# Altium PCB eq.PcbDoc (part 1 of 2)
Units mil, origin at the board's own origin, x right, y up, seen from the top; angles counter-clockwise.
Board outline 5200 x 16200 mil, 2 copper layers (Top Layer, Bottom Layer); 220 components, 157 nets, 622 pads, 115 vias.
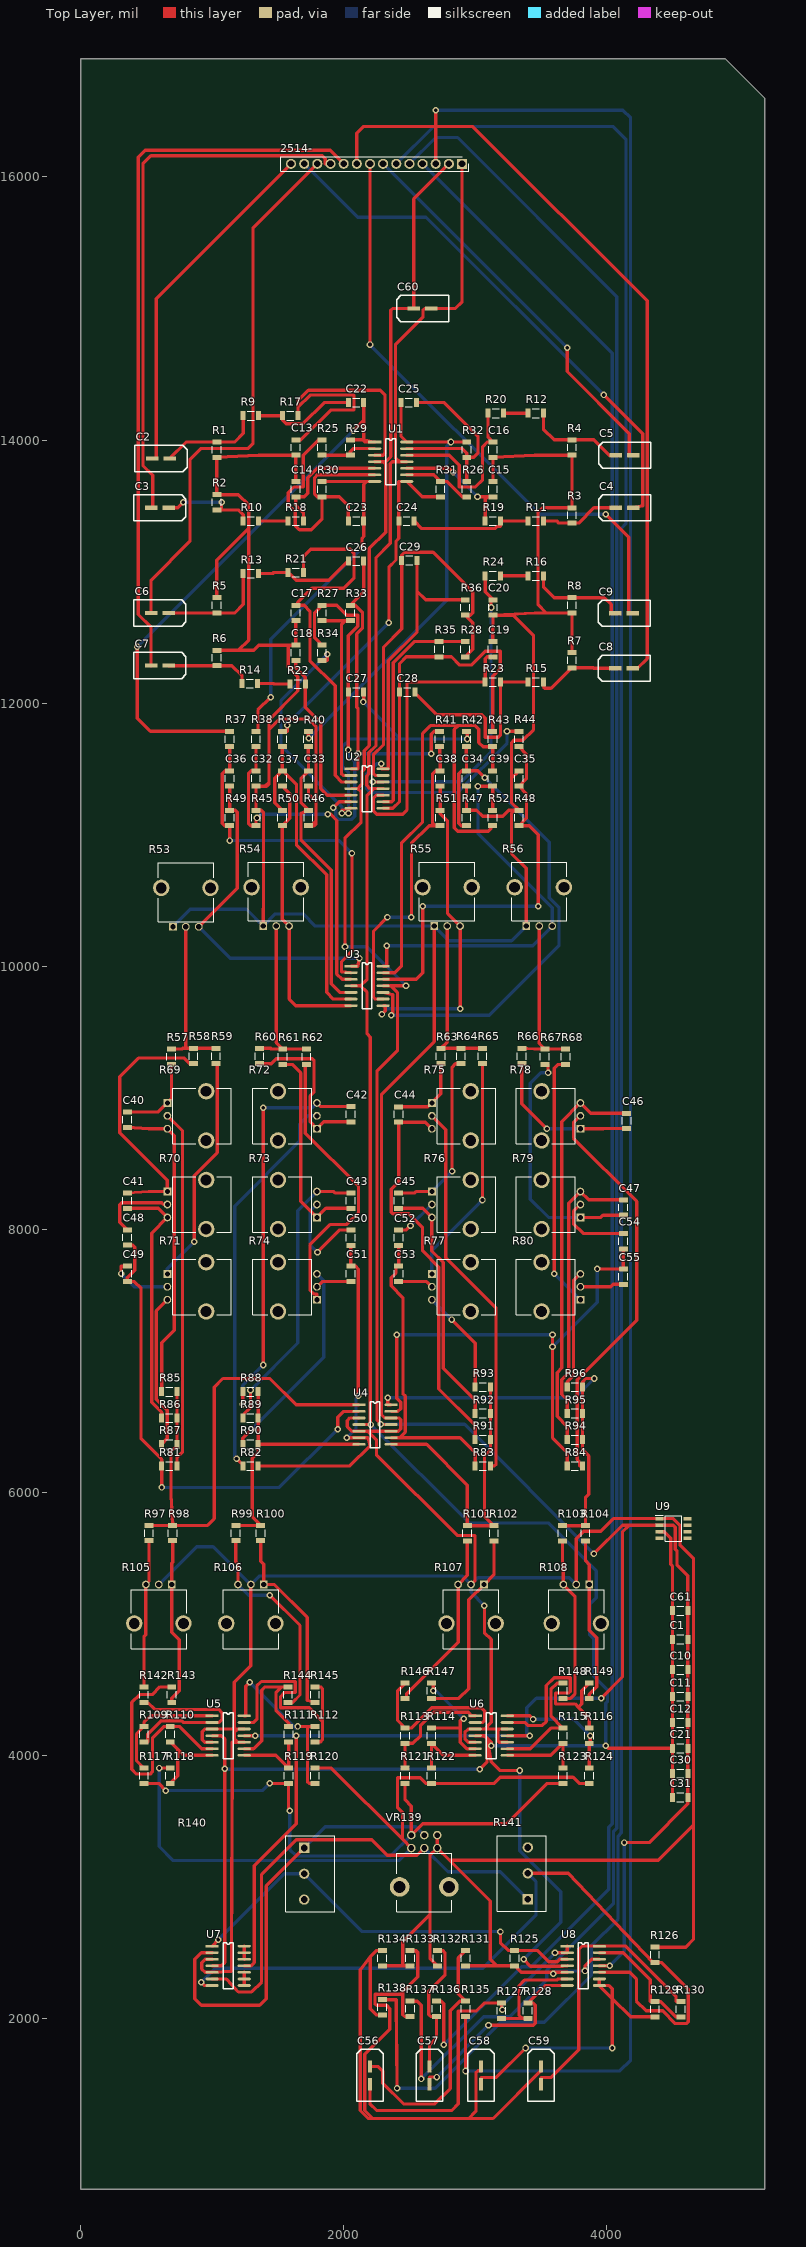
[diagram p0: Top Layer view]
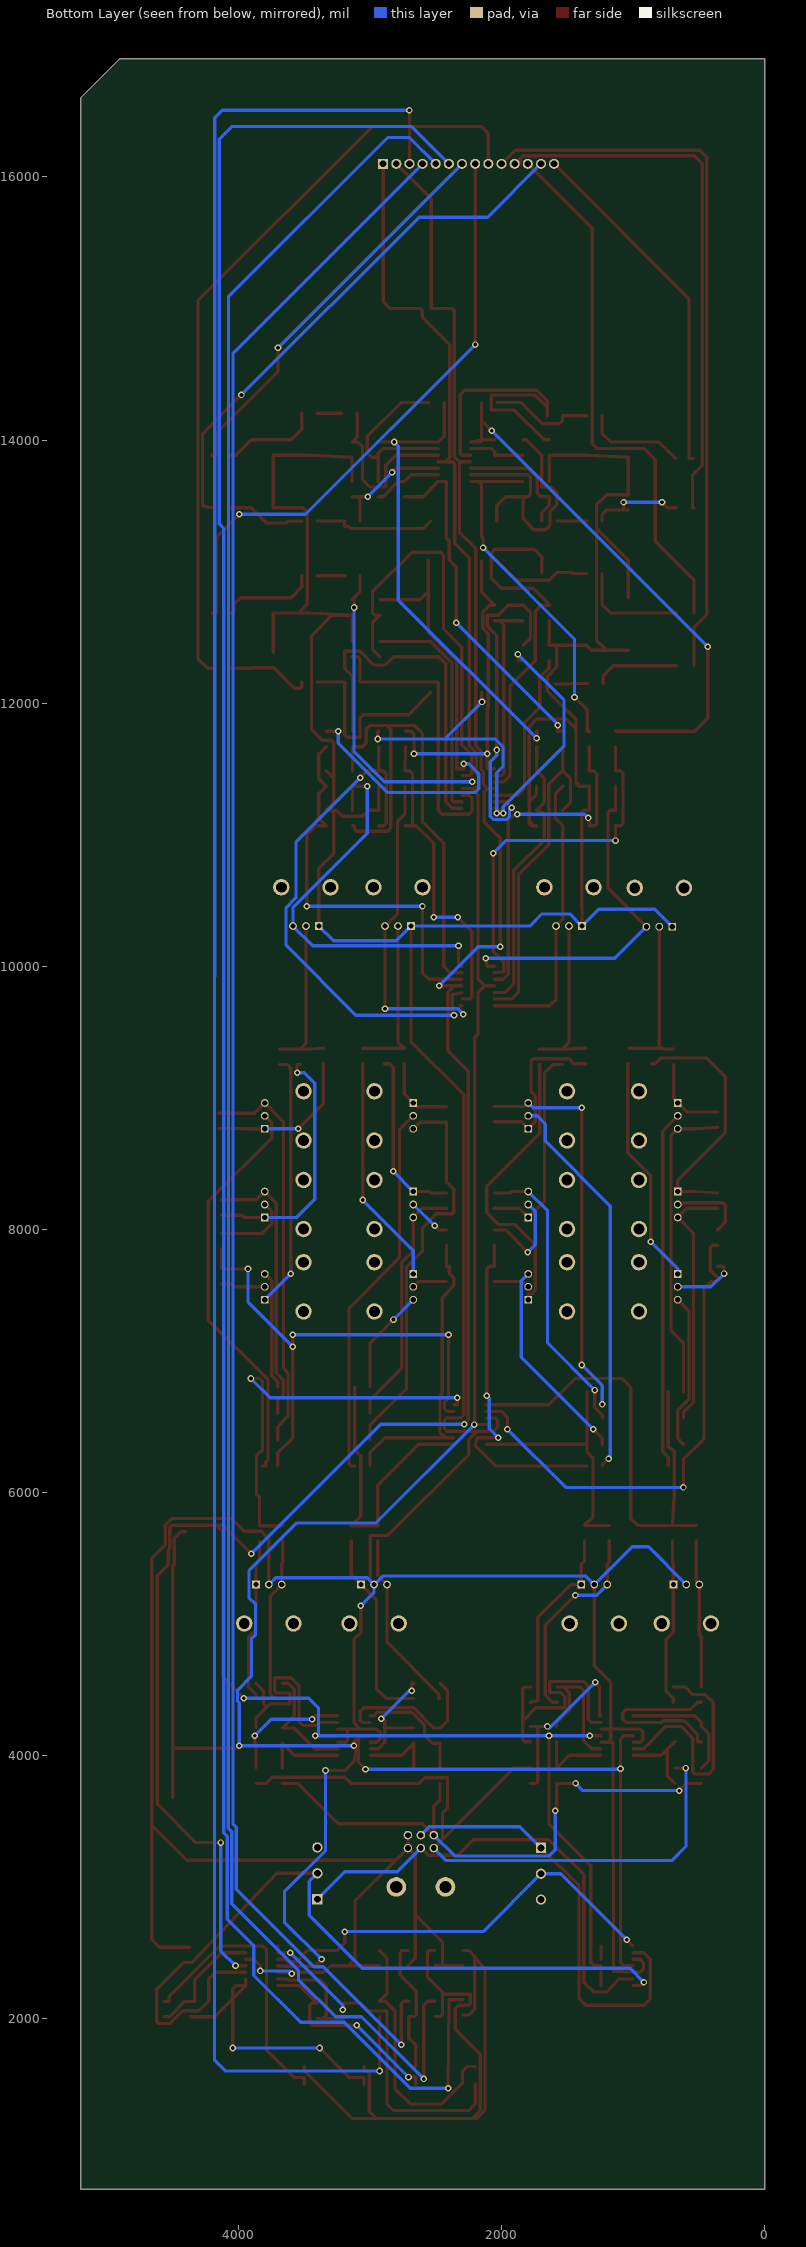
[diagram p1: Bottom Layer view, seen from below]

## Layer stack, top to bottom
Top Solder: solder mask 0.4, Solder Resist, Dk 3.5
Top Layer: signal copper 1.4
Dielectric 1: dielectric 12.6, FR-4, Dk 4.8
Bottom Layer: signal copper 1.4
Bottom Solder: solder mask 0.4, Solder Resist, Dk 3.5

## Board outline
0,16900 0,700 5200,700 5200,16600 4900,16900

## Design rules (kind name [scope] priority, off if disabled: settings)
Clearance [All] p1: gap=10 ignorepadtopadclearanceinfootprint=TRUE except(0: Arc-Hole Track-Hole SMDPad-Hole THPad-Hole Via-Hole Fill-Hole Poly-Hole Region-Hole Text-Hole)
PolygonConnect [All] p1: connectstyle=Relief reliefconductorwidth=10 reliefentries=4 polygonreliefangle="90 Angle" airgapwidth=10
RoutingVias [All] p1: holewidth=28 width=50 viastyle="Through Hole" minholewidth=28 minwidth=50 maxholewidth=28 maxwidth=50
SolderMaskExpansion [All] p1: expansion=4 istentingtop=FALSE
Width [All] p1: maxlimit=50 minlimit=15 preferedwidth=25 minimp=50.000000 maximp=50.000000 favimp=50.000000
30 further rules are at their usual default settings.

## Classes and differential pairs
component class U_Sheet4: 2514- C1 C10 C11 C12 C21 C30 C31 C60 C61 P-25 U9 X1
component class U_schema: C2 C3 C4 C5 C6 C7 C8 C9 C13 C14 C15 C16 C17 C18 C19 C20 C22 C23 C24 C25 C26 C27 C28 C29 C32 C33 C34 C35 C36 C37 C38 C39 P-1 P-2 P-3 P-4 P-5 P-6 P-7 P-9 P-10 P-G P-I P-x R1 R2 R3 R4 R5 R6 R7 R8 R9 R10 R11 R12 R13 R14 R15 R16 R17 R18 R19 R20 R21 R22 R23 R24 R25 R26 R27 R28 R29 R30 R31 R32 R33 R34 R35 R36 R37 R38 R39 R40 R41 R42 R43 R44 R45 R46 R47 R48 R49 R50 R51 R52 R53 R54 R55 R56 U1 U2 U3
component class U_schema3: C56 C57 C58 C59 P-20 P-21 P-22 P-23 P-24 P-? R125 R126 R127 R128 R129 R130 R131 R132 R133 R134 R135 R136 R137 R138 R140 R141 U7 U8 VR139
component class U_schema2: P-17 P-18 P-A P-B P-C P-D P-E P-F R97 R98 R99 R100 R101 R102 R103 R104 R105 R106 R107 R108 R109 R110 R111 R112 R113 R114 R115 R116 R117 R118 R119 R120 R121 R122 R123 R124 R142 R143 R144 R145 R146 R147 R148 R149 U5 U6
component class U_schema1: C40 C41 C42 C43 C44 C45 C46 C47 C48 C49 C50 C51 C52 C53 C54 C55 P-13 P-14 P-15 P-16 R57 R58 R59 R60 R61 R62 R63 R64 R65 R66 R67 R68 R69 R70 R71 R72 R73 R74 R75 R76 R77 R78 R79 R80 R81 R82 R83 R84 R85 R86 R87 R88 R89 R90 R91 R92 R93 R94 R95 R96 U4

## Components (designator, comment, footprint, x,y, rotation, side; value= is the part's Value field where it differs from the comment)
2514- "SSW-114-01-G-S" SHDR14W79P0X254_1X14_3607X241X851P 2900,16100 r180 top
C1 "Cap" SMD_CAPACITOR 4558.27,4881.89 r180 top value=100nF
C2 "Cap Pol1" SMD_POLAR_CAPACITOR 611.27,13860 r0 top value=10µF
C3 "Cap Pol1" SMD_POLAR_CAPACITOR 603,13485 r0 top value=10µF
C4 "Cap Pol1" SMD_POLAR_CAPACITOR 4136,13485 r180 top value=10µF
C5 "Cap Pol1" SMD_POLAR_CAPACITOR 4136,13885 r180 top value=10µF
C6 "Cap Pol1" SMD_POLAR_CAPACITOR 603,12685 r0 top value=10µF
C7 "Cap Pol1" SMD_POLAR_CAPACITOR 603,12285 r0 top value=10µF
C8 "Cap Pol1" SMD_POLAR_CAPACITOR 4132.01,12264.34 r180 top value=10µF
C9 "Cap Pol1" SMD_POLAR_CAPACITOR 4131.99,12682.95 r180 top value=10µF
C10 "Cap" SMD_CAPACITOR 4558.27,4651.27 r180 top value=100nF
C11 "Cap" SMD_CAPACITOR 4558.27,4447.37 r180 top value=100nF
C12 "Cap" SMD_CAPACITOR 4558.27,4248.65 r180 top value=100nF
C13 "Cap" SMD_CAPACITOR 1636,13943.27 r90 top value=1.5nF
C14 "Cap" SMD_CAPACITOR 1636,13626.73 r270 top value=1.5nF
C15 "Cap" SMD_CAPACITOR 3136,13626.73 r270 top value=1.5nF
C16 "Cap" SMD_CAPACITOR 3136,13926.73 r90 top value=1.5nF
C17 "Cap" SMD_CAPACITOR 1636,12685 r90 top value=1.5nF
C18 "Cap" SMD_CAPACITOR 1636,12381.91 r270 top value=1.5nF
C19 "Cap" SMD_CAPACITOR 3134.43,12409.82 r270 top value=1.5nF
C20 "Cap" SMD_CAPACITOR 3136,12726.73 r90 top value=1.5nF
C21 "Cap" SMD_CAPACITOR 4558.27,4053.2 r180 top value=100nF
C22 "Cap" SMD_CAPACITOR 2094.27,14285 r0 top value=100nF
C23 "Cap" SMD_CAPACITOR 2094.27,13385 r0 top value=100nF
C24 "Cap" SMD_CAPACITOR 2477.73,13385 r180 top value=100nF
C25 "Cap" SMD_CAPACITOR 2494.27,14285 r180 top value=100nF
C26 "Cap" SMD_CAPACITOR 2094.27,13080.62 r0 top value=100nF
C27 "Cap" SMD_CAPACITOR 2094.27,12085 r0 top value=100nF
C28 "Cap" SMD_CAPACITOR 2482.73,12085 r180 top value=100nF
C29 "Cap" SMD_CAPACITOR 2499.27,13085 r0 top value=100nF
C30 "Cap" SMD_CAPACITOR 4558.27,3861.72 r180 top value=100nF
C31 "Cap" SMD_CAPACITOR 4558.27,3680.75 r180 top value=100nF
C32 "Cap" SMD_CAPACITOR 1333.31,11426.73 r90 top value=22pF
C33 "Cap" SMD_CAPACITOR 1733.31,11426.73 r90 top value=22pF
C34 "Cap" SMD_CAPACITOR 2933.31,11426.73 r90 top value=22pF
C35 "Cap" SMD_CAPACITOR 3333.31,11426.73 r270 top value=22pF
C36 "Cap" SMD_CAPACITOR 1133.31,11426.73 r270 top value=22pF
C37 "Cap" SMD_CAPACITOR 1533.31,11426.73 r270 top value=22pF
C38 "Cap" SMD_CAPACITOR 2733.31,11426.73 r270 top value=22pF
C39 "Cap" SMD_CAPACITOR 3132.7,11426.73 r270 top value=22pF
C40 "Cap" SMD_CAPACITOR 355,8833.27 r270 top value=47nF
C41 "Cap" SMD_CAPACITOR 355,8216.73 r270 top value=4nF7
C42 "Cap" SMD_CAPACITOR 2055,8875 r90 top value=47nF
C43 "Cap" SMD_CAPACITOR 2055,8216.73 r90 top value=4nF7
C44 "Cap" SMD_CAPACITOR 2418.53,8872.47 r270 top value=47nF
C45 "Cap" SMD_CAPACITOR 2418.53,8216.73 r270 top value=4nF7
C46 "Cap" SMD_CAPACITOR 4151.73,8823.27 r90 top value=47nF
C47 "Cap" SMD_CAPACITOR 4126.73,8165 r90 top value=4nF7
C48 "Cap" SMD_CAPACITOR 355,7937.05 r270 top value=4nF7
C49 "Cap" SMD_CAPACITOR 355,7660.43 r270 top value=4nF7
C50 "Cap" SMD_CAPACITOR 2055,7936.16 r270 top value=4nF7
C51 "Cap" SMD_CAPACITOR 2055,7660.43 r90 top value=4nF7
C52 "Cap" SMD_CAPACITOR 2418.53,7936.16 r270 top value=4nF7
C53 "Cap" SMD_CAPACITOR 2418.53,7660.43 r90 top value=4nF7
C54 "Cap" SMD_CAPACITOR 4126.73,7909.58 r270 top value=4nF7
C55 "Cap" SMD_CAPACITOR 4126.73,7639.8 r90 top value=4nF7
C56 "Cap Pol1" SMD_POLAR_CAPACITOR 2200,1567 r90 top value=10µF
C57 "Cap Pol1" SMD_POLAR_CAPACITOR 2652.87,1567 r90 top value=10µF
C58 "Cap Pol1" SMD_POLAR_CAPACITOR 3044.82,1567 r90 top value=10µF
C59 "Cap Pol1" SMD_POLAR_CAPACITOR 3500,1567 r90 top value=10µF
C60 "Cap Pol1" SMD_POLAR_CAPACITOR 2600,15000 r180 top value=100pF
C61 "Cap" SMD_CAPACITOR 4558.27,5100 r180 top value=100nF
R1 "Res2" SMD_RESISTOR 1036,13926.73 r90 top value=1K5
R2 "Res2" SMD_RESISTOR 1036,13526.73 r270 top value=1K5
R3 "Res2" SMD_RESISTOR 3736,13426.73 r270 top value=1K5
R4 "Res2" SMD_RESISTOR 3736,13943.27 r90 top value=1K5
R5 "Res2" SMD_RESISTOR 1036,12743.27 r270 top value=1K5
R6 "Res2" SMD_RESISTOR 1036,12343.27 r270 top value=1K5
R7 "Res2" SMD_RESISTOR 3736,12326.73 r270 top value=1K5
R8 "Res2" SMD_RESISTOR 3736,12743.27 r90 top value=1K5
R9 "Res2" SMD_RESISTOR 1294.27,14185 r0 top value=430R
R10 "Res2" SMD_RESISTOR 1294.27,13385 r0 top value=430R
R11 "Res2" SMD_RESISTOR 3460.46,13385 r180 top value=430R
R12 "Res2" SMD_RESISTOR 3460.46,14203.88 r180 top value=430R
R13 "Res2" SMD_RESISTOR 1294.27,12985 r0 top value=430R
R14 "Res2" SMD_RESISTOR 1285.7,12149.22 r0 top value=430R
R15 "Res2" SMD_RESISTOR 3460.46,12159.7 r180 top value=430R
R16 "Res2" SMD_RESISTOR 3460.46,12967.84 r180 top value=430R
R17 "Res2" SMD_RESISTOR 1594.27,14185 r0 top value=430R
R18 "Res2" SMD_RESISTOR 1636,13385 r0 top value=430R
R19 "Res2" SMD_RESISTOR 3134.43,13385 r180 top value=430R
R20 "Res2" SMD_RESISTOR 3155.56,14203.88 r180 top value=430R
R21 "Res2" SMD_RESISTOR 1636,12993.63 r0 top value=430R
R22 "Res2" SMD_RESISTOR 1649.91,12145.73 r0 top value=430R
R23 "Res2" SMD_RESISTOR 3134.43,12159.7 r180 top value=430R
R24 "Res2" SMD_RESISTOR 3134.43,12967.84 r180 top value=430R
R25 "Res2" SMD_RESISTOR 1836,13943.27 r270 top value=680R
R26 "Res2" SMD_RESISTOR 2936,13626.73 r270 top value=680R
R27 "Res2" SMD_RESISTOR 1836,12685 r270 top value=680R
R28 "Res2" SMD_RESISTOR 2924.36,12409.82 r90 top value=680R
R29 "Res2" SMD_RESISTOR 2050.96,13943.27 r90 top value=150R
R30 "Res2" SMD_RESISTOR 1836,13626.73 r90 top value=150R
R31 "Res2" SMD_RESISTOR 2736,13626.73 r270 top value=150R
R32 "Res2" SMD_RESISTOR 2936,13926.73 r90 top value=150R
R33 "Res2" SMD_RESISTOR 2050.96,12685 r90 top value=150R
R34 "Res2" SMD_RESISTOR 1836,12381.91 r270 top value=150R
R35 "Res2" SMD_RESISTOR 2725.96,12409.82 r270 top value=150R
R36 "Res2" SMD_RESISTOR 2924.36,12726.73 r90 top value=150R
R37 "Res2" SMD_RESISTOR 1133.31,11726.73 r270 top value=1K
R38 "Res2" SMD_RESISTOR 1333.31,11726.73 r270 top value=1K
R39 "Res2" SMD_RESISTOR 1533.31,11726.73 r270 top value=1K
R40 "Res2" SMD_RESISTOR 1731.37,11726.73 r270 top value=1K
R41 "Res2" SMD_RESISTOR 2729.88,11726.73 r270 top value=1K
R42 "Res2" SMD_RESISTOR 2932.51,11726.73 r270 top value=1K
R43 "Res2" SMD_RESISTOR 3132.7,11726.73 r270 top value=1K
R44 "Res2" SMD_RESISTOR 3333.31,11726.73 r270 top value=1K
R45 "Res2" SMD_RESISTOR 1333.31,11126.73 r270 top value=1K
R46 "Res2" SMD_RESISTOR 1733.31,11126.73 r90 top value=1K
R47 "Res2" SMD_RESISTOR 2933.31,11126.73 r270 top value=1K
R48 "Res2" SMD_RESISTOR 3333.31,11126.73 r270 top value=1K
R49 "Res2" SMD_RESISTOR 1133.31,11126.73 r90 top value=1K
R50 "Res2" SMD_RESISTOR 1533.31,11126.73 r270 top value=1K
R51 "Res2" SMD_RESISTOR 2733.31,11126.73 r90 top value=1K
R52 "Res2" SMD_RESISTOR 3133.31,11126.73 r90 top value=1K
R53 "*" RK09L1140A65 701.57,10300 r0 top value="10K Log"
R54 "*" RK09L1140A65 1388.58,10304.72 r0 top value="10K Log"
R55 "*" RK09L1140A65 2688.58,10304.72 r0 top value="10K Log"
R56 "*" RK09L1140A65 3388.58,10304.72 r0 top value="10K Log"
R57 "Res2" SMD_RESISTOR 690.38,9311.15 r270 top value=11K
R58 "Res2" SMD_RESISTOR 858.44,9316.73 r270 top value=3K6
R59 "Res2" SMD_RESISTOR 1029.88,9316.73 r270 top value=2K4
R60 "Res2" SMD_RESISTOR 1360.08,9316.73 r270 top value=11K
R61 "Res2" SMD_RESISTOR 1536.8,9311.15 r270 top value=3K6
R62 "Res2" SMD_RESISTOR 1718.18,9311.15 r270 top value=2K4
R63 "Res2" SMD_RESISTOR 2739.07,9316.73 r270 top value=11K
R64 "Res2" SMD_RESISTOR 2892.56,9316.73 r270 top value=3K6
R65 "Res2" SMD_RESISTOR 3055,9316.73 r270 top value=2K4
R66 "Res2" SMD_RESISTOR 3355,9316.73 r270 top value=11K
R67 "Res2" SMD_RESISTOR 3529.69,9311.15 r270 top value=3K6
R68 "Res2" SMD_RESISTOR 3687.81,9311.15 r270 top value=2K4
R69 "*" RK09L1140A65 659.72,8960.43 r270 top value=100K
R70 "*" RK09L1140A65 659.72,8286.42 r270 top value=100K
R71 "*" RK09L1140A65 659.72,7660.43 r270 top value=50K
R72 "*" RK09L1140A65 1796.45,8763.58 r90 top value=100K
R73 "*" RK09L1140A65 1796.45,8089.57 r90 top value=100K
R74 "*" RK09L1140A65 1796.45,7463.58 r90 top value=50K
R75 "*" RK09L1140A65 2670.73,8960.43 r270 top value=100K
R76 "*" RK09L1140A65 2670.73,8286.42 r270 top value=100K
R77 "*" RK09L1140A65 2670.73,7660.43 r270 top value=50K
R78 "*" RK09L1140A65 3799.87,8763.58 r90 top value=100K
R79 "*" RK09L1140A65 3799.87,8089.57 r90 top value=100K
R80 "*" RK09L1140A65 3799.87,7463.58 r90 top value=50K
R81 "Res2" SMD_RESISTOR 675,6200 r0 top value=11K
R82 "Res2" SMD_RESISTOR 1291.45,6200 r180 top value=11K
R83 "Res2" SMD_RESISTOR 3058.27,6200 r0 top value=11K
R84 "Res2" SMD_RESISTOR 3758.27,6200 r0 top value=11K
R85 "Res2" SMD_RESISTOR 675,6765 r0 top value=11K
R86 "Res2" SMD_RESISTOR 675,6565 r0 top value=3K6
R87 "Res2" SMD_RESISTOR 675,6365 r0 top value=2K4
R88 "Res2" SMD_RESISTOR 1291.45,6765 r0 top value=11K
R89 "Res2" SMD_RESISTOR 1291.45,6565 r0 top value=3K6
R90 "Res2" SMD_RESISTOR 1291.45,6365 r0 top value=2K4
R91 "Res2" SMD_RESISTOR 3058.27,6400 r0 top value=11K
R92 "Res2" SMD_RESISTOR 3058.27,6600 r0 top value=3K6
R93 "Res2" SMD_RESISTOR 3058.27,6800 r0 top value=2K4
R94 "Res2" SMD_RESISTOR 3758.27,6400 r0 top value=11K
R95 "Res2" SMD_RESISTOR 3758.27,6600 r0 top value=3K6
R96 "Res2" SMD_RESISTOR 3758.27,6800 r0 top value=2K4
R97 "Res2" SMD_RESISTOR 520,5690 r270 top value=10K
R98 "Res2" SMD_RESISTOR 700.04,5690 r270 top value=10K
R99 "Res2" SMD_RESISTOR 1179.81,5690 r270 top value=10K
R100 "Res2" SMD_RESISTOR 1369.37,5690 r270 top value=10K
R101 "Res2" SMD_RESISTOR 2940.55,5688.3 r270 top value=10K
R102 "Res2" SMD_RESISTOR 3142.74,5688.3 r270 top value=10K
R103 "Res2" SMD_RESISTOR 3663.62,5688.3 r270 top value=10K
R104 "Res2" SMD_RESISTOR 3839.37,5688.3 r270 top value=10K
R105 "*" RK09L1140A65 693.15,5298.54 r180 top value=10K
R106 "*" RK09L1140A65 1393.15,5298.54 r180 top value=10K
R107 "*" RK09L1140A65 3067.17,5298.54 r180 top value=10K
R108 "*" RK09L1140A65 3867.17,5298.54 r180 top value=10K
R109 "Res2" SMD_RESISTOR 481.73,4161.54 r90 top value=51K
R110 "Res2" SMD_RESISTOR 681.73,4161.54 r270 top value=51K
R111 "Res2" SMD_RESISTOR 1581.73,4161.54 r270 top value=51K
R112 "Res2" SMD_RESISTOR 1781.73,4161.54 r90 top value=51K
R113 "Res2" SMD_RESISTOR 2467.17,4149.5 r270 top value=51K
R114 "Res2" SMD_RESISTOR 2667.17,4149.5 r270 top value=51K
R115 "Res2" SMD_RESISTOR 3667.17,4149.5 r270 top value=51K
R116 "Res2" SMD_RESISTOR 3867.17,4149.5 r270 top value=51K
R117 "Res2" SMD_RESISTOR 481.73,3845 r270 top value=1K
R118 "Res2" SMD_RESISTOR 681.73,3845 r90 top value=1K
R119 "Res2" SMD_RESISTOR 1581.73,3845 r270 top value=1K
R120 "Res2" SMD_RESISTOR 1781.73,3845 r90 top value=1K
R121 "Res2" SMD_RESISTOR 2467.17,3845 r270 top value=1K
R122 "Res2" SMD_RESISTOR 2667.17,3845 r270 top value=1K
R123 "Res2" SMD_RESISTOR 3667.17,3845 r270 top value=1K
R124 "Res2" SMD_RESISTOR 3867.17,3845 r270 top value=1K
R125 "Res2" SMD_RESISTOR 3300,2458.27 r90 top value=470K
R126 "Res2" SMD_RESISTOR 4367.73,2483.06 r270 top value=470K
R127 "Res2" SMD_RESISTOR 3200,2058.27 r90 top value=10K
R128 "Res2" SMD_RESISTOR 3400,2058.27 r90 top value=10K
R129 "Res2" SMD_RESISTOR 4367.74,2070.69 r270 top value=10K
R130 "Res2" SMD_RESISTOR 4563.26,2070.69 r90 top value=10K
R131 "Res2" SMD_RESISTOR 2927.93,2458.27 r90 top value=10K
R132 "Res2" SMD_RESISTOR 2712.99,2458.27 r90 top value=10K
R133 "Res2" SMD_RESISTOR 2505.65,2458.27 r90 top value=10K
R134 "Res2" SMD_RESISTOR 2294.28,2458.27 r90 top value=10K
R135 "Res2" SMD_RESISTOR 2927.93,2072.76 r270 top value=10K
R136 "Res2" SMD_RESISTOR 2705.13,2072.76 r90 top value=10K
R137 "Res2" SMD_RESISTOR 2505.65,2072.76 r90 top value=10K
R138 "Res2" SMD_RESISTOR 2294.28,2083.88 r90 top value=10K
R140 "PDB181-K215K-104B" PDB181K220K104B 1700,3296.85 r180 top
R141 "PDB181-K215K-104B" PDB181K220K104B 3400,2906.3 r0 top
R142 "Res2" SMD_RESISTOR 481.73,4461.54 r270 top value=10K
R143 "Res2" SMD_RESISTOR 693.15,4461.54 r90 top value=10K
R144 "Res2" SMD_RESISTOR 1576.49,4461.54 r90 top value=10K
R145 "Res2" SMD_RESISTOR 1781.73,4461.54 r90 top value=10K
R146 "Res2" SMD_RESISTOR 2467.17,4490.67 r90 top value=10K
R147 "Res2" SMD_RESISTOR 2667.17,4490.67 r90 top value=10K
R148 "Res2" SMD_RESISTOR 3667.17,4490.67 r90 top value=10K
R149 "Res2" SMD_RESISTOR 3867.17,4490.67 r90 top value=10K
U1 "OPA1664AIDR" OPA1664AIDR 2236,13985 r0 top
U2 "OPA1664AIDR" OPA1664AIDR 2056,11500 r0 top
U3 "OPA1664AIDR" OPA1664AIDR 2056,10000 r0 top
U4 "OPA1664AIDR" OPA1664AIDR 2116.73,6665 r0 top
U5 "OPA1664AIDR" OPA1664AIDR 1000,4300 r0 top
U6 "OPA1664AIDR" OPA1664AIDR 3000,4300 r0 top
U7 "OPA1664AIDR" OPA1664AIDR 1000,2550 r0 top
U8 "OPA1664AIDR" OPA1664AIDR 3700,2550 r0 top
U9 "TLE2426CDR" SOIC127P600X175-8N 4506.73,5725 r0 top
VR139 "RK09L1240A12" RK09L124A12 2712.99,3393.7 r90 top

## Footprints (in the part's own frame and the unit in brackets; to place one, negate y for a bottom-side part, rotate by r counter-clockwise, add the part's x,y. Pads: shape width x height; smd on the part's side, far side on the other; paste and mask are expansions set on the pad)
OPA1664AIDR [mil]
  rect 100x20 smd: 1(0,0)
  oval 100x20 smd: 2(0,-50) 3(0,-100) 4(0,-150) 5(0,-200) 6(0,-250) 7(0,-300) 8(244,-300) 9(244,-250) 10(244,-200) 11(244,-150) 12(244,-100) 13(244,-50) 14(244,0)
  silkscreen extent 85,-325 159,25
PDB181K220K104B [mm]
  rect 1.98x1.98 hole 1.32: 1(0,0)
  round 1.98 hole 1.32: 2(0,5) 3(0,10)
  silkscreen extent -5.9,-2.3 3.6,12.3
RK09L124A12 [mm]
  round 1.65 hole 1.1: A1(0,0.04) A2(0,2.54) A3(0,5.04) B1(-2.5,0.04) B2(-2.5,2.54) B3(-2.5,5.04)
  round 3.795 hole 2.33: MH1(-10,-2.21) MH2(-10,7.29)
  silkscreen extent -14.85,-2.81 -3.5,7.89, body extent -14.85,-3.27 0.45,8.35, height 30.1
RK09L1140A65 [mm]
  rect 1.5x1.5 hole 1: 1(0,0)
  round 1.5 hole 1: 2(2.5,0) 3(5,0)
  round 3.164 hole 2.11: MH1(-2.25,7.5) MH2(7.25,7.5)
  silkscreen extent -2.85,1 7.85,12.35, body extent -3.2,-0.4 8.2,12.35, height 35.1
SHDR14W79P0X254_1X14_3607X241X851P [mm]
  rect 1.95x1.95 hole 1.3: 1(0,0)
  round 1.95 hole 1.3: 2(2.54,0) 3(5.08,0) 4(7.62,0) 5(10.16,0) 6(12.7,0) 7(15.24,0) 8(17.78,0) 9(20.32,0) 10(22.86,0) 11(25.4,0) 12(27.94,0) 13(30.48,0) 14(33.02,0)
  silkscreen extent -1.27,-1.33 35.05,1.45
SMD_CAPACITOR [mm]
  rect 0.97x1.73 smd: 1(-1.48,0) 2(1.48,0)
  silkscreen extent -0.67,-0.85 0.67,0.85
SMD_POLAR_CAPACITOR [mil]
  rect 94x32 smd: 1(-67,0) 2(67,0)
  silkscreen extent -198,-100 198,100
SMD_RESISTOR [mm]
  rect 0.97x1.73 smd: 1(-1.48,0) 2(1.48,0)
  silkscreen extent -0.67,-0.85 0.67,0.85
SOIC127P600X175-8N [mm]
  rect 1.528x0.65 smd: 1(-2.711,1.905) 2(-2.711,0.635) 3(-2.711,-0.635) 4(-2.711,-1.905) 5(2.711,-1.905) 6(2.711,-0.635) 7(2.711,0.635) 8(2.711,1.905)
  silkscreen extent -3.47,-2.45 1.6,2.58, body extent -3,-2.45 3,2.45, height 1.75

## Part data
2514-: "Capacitor", Manufacturer_Name=SAMTEC, Datasheet Link=http://suddendocs.samtec.com/prints/ssw-1xx-xx-xxx-x-xx-xxx-xx-mkt.pdf, Height=8.51mm, Manufacturer_Part_Number=SSW-114-01-G-S
C1 C10 C11 C12 C13 C14 C15 C16 C17 C18 C19 C20 C21 C22 C23 C24 C25 C26 C27 C28 C29 C30 C31 C32 C33 C34 C35 C36 C37 C38 C39 C40 C41 C42 C43 C44 C45 C46 C47 C48 C49 C50 C51 C52 C53 C54 C55 C61: "Capacitor", LatestRevisionDate=17-Jul-2002, LatestRevisionNote="Re-released for DXP Platform.", PackageDescription="Radial Cap, Thru-Hole; 2 Leads; 0.3 in Pin Spacing", PackageReference=RAD-0.3, Published=8-Jun-2000, Publisher="Altium Limited"
C2 C3 C4 C5 C6 C7 C8 C9 C56 C57 C58 C59 C60: "Polarized Capacitor (Radial)", LatestRevisionDate=17-Jul-2002, LatestRevisionNote="Re-released for DXP Platform.", PackageDescription="Polarized Capacitor (Radial); 2 Leads", PackageReference=RB7.6-15, Published=8-Jun-2000, Publisher="Altium Limited"
R1 R2 R3 R4 R5 R6 R7 R8 R9 R10 R11 R12 R13 R14 R15 R16 R17 R18 R19 R20 R21 R22 R23 R24 R25 R26 R27 R28 R29 R30 R31 R32 R33 R34 R35 R36 R37 R38 R39 R40 R41 R42 R43 R44 R45 R46 R47 R48 R49 R50 R51 R52 R57 R58 R59 R60 R61 R62 R63 R64 R65 R66 R67 R68 R81 R82 R83 R84 R85 R86 R87 R88 R89 R90 R91 R92 R93 R94 R95 R96 R97 R98 R99 R100 R101 R102 R103 R104 R109 R110 R111 R112 R113 R114 R115 R116 R117 R118 R119 R120 R121 R122 R123 R124 R125 R126 R127 R128 R129 R130 R131 R132 R133 R134 R135 R136 R137 R138 R142 R143 R144 R145 R146 R147 R148 R149: "Resistor", LatestRevisionDate=17-Jul-2002, LatestRevisionNote="Re-released for DXP Platform.", PackageDescription="Axial Device, Thru-Hole; 2 Leads; 0.4 in Pin Spacing", PackageReference=AXIAL-0.4, Published=8-Jun-2000, Publisher="Altium Limited"
R53 R54 R55 R56: library part RK09L, DeviceSetName=RK09L, GateName_1=G$1, LibraryName=SD_Pots, SymbolName_1=POT_EU-
R69 R70 R71 R72 R73 R74 R75 R76 R77 R78 R79 R80 R105 R106 R107 R108: library part RK09L_1, DeviceSetName=RK09L, GateName_1=G$1, LibraryName=SD_Pots, SymbolName_1=POT_EU-
R140 R141: "Variable Resistor", Manufacturer_Name=Bourns, Height=16.5mm, Manufacturer_Part_Number=PDB181-K215K-104B
U1 U2 U3 U4 U5 U6 U7 U8: library part CMP-0272-00211-3, "Sound Plus Low-Power, Low-Noise and Distortion, Audio Operational Amplifier, 3 to 36 V, -40 to 85 degC, 14-pin SOIC (D14), Green (RoHS & no Sb/Br)", Manufacturer="Texas Instruments", Rating=Catalog, Total Supply Voltage(Max)(+5V is 5, +/-5V is 10)=36, Total Supply Voltage(Min)(+5V is 5, +/-5V is 10)=3, CMRR(Min)(dB)=106, Code_JEDEC=MS-012, ComponentLink1Description="Manufacturer URL", ComponentLink1URL=http://www.ti.com/, ComponentLink2Description=Datasheet, ComponentLink2URL=http://www.ti.com/lit/ds/symlink/opa1664.pdf, ComponentLink3Description="Package Specification", ComponentLink3URL=http://www.ti.com/lit/ml/mpds177g/mpds177g.pdf, DatasheetVersion=SBOS489, Eco-Plan="Green (RoHS & no Sb/Br)", GBW(Typ)(MHz)=22, IIB(Max)(pA)=1200000, Iq per channel(Max)(mA)=1.5, Mounting Technology="Surface Mount", Number of Channels=4, Offset Drift(Typ)(uV/C)=2, PackageDescription="14-Pin Plastic Small Outline, Body 8.65 x 3.9 mm, Pitch 1.27 mm", PackageReference=D0014A, PackageVersion="4040047-5/M, 06/2011", Packing="LARGE T&R", PartNumber=OPA1664AIDR, Slew Rate(Typ)(V/us)=17, Sub Family="Audio Operational Amplifier, High Supply Voltage Amplifier (>=30V), Low Noise Amp (<=10nV/rtHz), Precision Amplifier", Vio (25C)(Max)(mV)=1.5
U9: "Integrated Circuit", Manufacturer_Name="Texas Instruments", Mouser2 Part Number=595-TLE2426CDR, Datasheet Link=http://www.ti.com/lit/gpn/TLE2426, Height=1.75mm, Manufacturer_Part_Number=TLE2426CDR, Mouser2 Price/Stock=https://www.mouser.com/Search/Refine.aspx?Keyword=595-TLE2426CDR
VR139: "Variable Resistor", Manufacturer_Name=ALPS, Mouser2 Part Number=688-RK09L1240A12, Datasheet Link=https://componentsearchengine.com/Datasheets/1/RK09L1240A12.pdf, Height=30mm, Manufacturer_Part_Number=RK09L1240A12, Mouser2 Price/Stock=https://www.mouser.com/Search/Refine.aspx?Keyword=688-RK09L1240A12

## Via types
v1: diameter 50, hole 28, Top Layer to Bottom Layer, 115 vias

## Nets (pads, with @x,y where several pads share a name; then routed paths per layer and width w, separated by ;. In a path a pad name is that pad's centre, name@x,y a point inside that pad or via, vN(x,y) a via of type N, cw(c..) or ccw(c..) an arc to the next point about the centre after c; other vN are vias at no path point)
AGND: C13.1 C14.1 C15.1 C16.1 C17.1 C18.1 C19.1 C20.1 C32.1 C33.1 C34.1 C35.1 R1.1 R2.1 R3.1 R4.1 R5.1 R6.1 R7.1 R8.1 R45.1 R46.1 R47.1 R48.1 R53.1 R54.1 R55.1 R56.1 R105.2 R106.2 R107.2 R108.2 R125.1 R126.1 R131.1 R132.1 R133.1 R134.1 U4.3 U4.5 U4.10 U4.12 U5.3 U5.5 U5.10 U5.12 U6.3 U6.5 U6.10 U6.12 U7.3 U7.5 U8.5 U8.12 U9.1 VR139.A1 VR139.B1 | length 43865
  Top Layer w25: U7.3@1000,2450 946,2450 921,2425 921,2375 946,2350 U7.5@1000,2350 1148,2358 1152,4100 1193.32,4100 ; U5.5@1000,4100 944,4100 925,4119 925,4181 944,4200 U5.3@1000,4200 1181.5,4200 ; R6.1@1036,12401.54 1200,12401.54 ; R5.1@1036,12801.54 1036,13086 1278,13328 ; U5.10@1244,4100 1193.32,4100 ; U5.12@1244,4200 1193.32,4200 ; R106.2@1294.72,5298.54 1294.72,4680.72 1169,4555 1169,4212.5 1181.5,4200 ; R54.1@1388.58,10304.72 1388.58,10437.58 1390,10439 1390,11170 1375,11185 R45.1@1333.31,11185 C32.1@1333.31,11368.46 1401.46,11368.46 ; C17.1@1636,12626.73 C18.1@1636,12440.18 1594.18,12440.18 ; C14.1@1636,13685 C13.1@1636,13885 1352.54,13885 R1.1@1036,13868.46 R2.1@1036,13585 1200,13585 1278,13507 1278,13328 ; R46.1@1733.31,11068.46 R46.1@1753.35,11068.46 ; C33.1@1733.31,11368.46 1733.31,11305.69 1790,11249 ; U4.3@2116.73,6565 2048,6565 2028,6545 2028,6500 2063,6465 U4.5@2116.73,6465 2162.21,6465 2184,6465 ; R134.1@2294.28,2400 2461.5,2400 ; R133.1@2505.65,2400 2461.5,2400 ; R55.1@2688.58,10304.72 2688.58,9426.58 2288,9026 2288,6587.5 2310.5,6565 U4.12@2360.73,6565 2420,6565 2433.23,6551.77 2433.23,6483 2415.23,6465 U4.10@2360.73,6465 2184,6465 ; VR139.A1@2711.42,3393.7 VR139.B1@2711.42,3295.28 ; R132.1@2712.99,2400 2656,2456.99 2656,2789 ; R131.1@2927.93,2400 3164,2400 ; C34.1@2933.31,11368.46 R47.1@2933.31,11185 3010,11185 3056,11139 3210,11139 3256,11185 3298.5,11185 ; R107.2@2968.74,5298.54 2998,5327.8 2998,5672 2863,5672 2249,6286 2249,6400 2184,6465 ; U6.5@3000,4100 2947,4100 2922,4125 2922,4175 2947,4200 U6.3@3000,4200 3072,4200 ; v1(3070,5137) 3070,4933 3122,4881 3122,4250 3072,4200 ; C19.1@3134.43,12468.09 3134.43,12567 3136,12568.57 C20.1@3136,12668.46 ; C15.1@3136,13685 C16.1@3136,13868.46 3452.54,13885 R4.1@3736,13885 R3.1@3736,13485 3512,13485 3477,13450 3477,12750 3542,12685 ; U6.10@3244,4100 3183.5,4100 3171,4112.5 3171,4187.5 3183.5,4200 ; U6.12@3244,4200 3183.5,4200 ; C35.1@3333.31,11485 3276,11427.69 ; R56.1@3388.58,10304.72 3388.58,10743.42 3276,10856 3276,11162.5 3298.5,11185 ; v1(3594,2339) v1@3594,2350 ; U8.5@3700,2350 v1@3594,2350 ; R7.1@3736,12385 R8.1@3736,12685 3542,12685 ; R108.2@3768.74,5298.54 3768.74,5646.74 3826,5704 3955,5704 4051,5800 U9.1@4400,5800 4507,5800 4557,5750 4557,5601.5 4659,5499.5 4659,3470 ; v1(3835,2361) 3835,2400 3885,2450 U8.12@3944,2450 ; R126.1@4367.73,2541.33 4600.33,2541.33 4659,2600 4659,3470 ; 1181.5,4200 1193.32,4200 ; 1193.32,4100 1168.32,4125 1168.32,4175 1193.32,4200 ; 1200,12401.54 1316,12401.54 1354.64,12440.18 1594.18,12440.18 ; 1200,12401.54 1278,12479.54 1278,13328 ; 1401.46,11368.46 1414,11368.46 1433,11387.46 1433,11400 ; 1401.46,11368.46 1433,11400 ; 1433,11400 1433,11800 ; 1433,11800 1433,11873 1652,12092 1652,12202 1579,12275 1579,12425 1594.18,12440.18 ; 1433,11800 1512.6,11879.6 1730.4,11879.6 1790,11820 1790,11249 ; R46.1@1753.35,11068.46 1775,11068.46 1790,11083.46 1790,11105.12 ; R46.1@1753.35,11068.46 1790,11105.12 ; 1790,11105.12 1790,11249 ; 2461.5,2400 2449,2412.5 2449,2582 2656,2789 ; 2656,2789 2656,3239.86 VR139.B1@2711.42,3295.28 ; VR139.B1@2711.42,3295.28 2804.69,3202 ; 2804.69,3202 3114,2892.69 3114,2450 3164,2400 ; 2804.69,3202 4391,3202 4659,3470 ; 3072,4200 3183.5,4200 ; C20.1@3136,12668.46 3289,12668.46 3444,12513.46 3444,11799 3362,11717 3293,11717 3276,11700 3276,11427.69 ; C20.1@3136,12668.46 3452.54,12685 3542,12685 ; 3164,2400 R125.1@3300,2400 3350,2350 v1@3594,2350 ; 3276,11427.69 3276,11242.31 R48.1@3333.31,11185 3298.5,11185
  Bottom Layer w25: R105.2@594.72,5298.54 882.18,5586 1007.27,5586 R106.2@1294.72,5298.54 1359.18,5363 2904.28,5363 R107.2@2968.74,5298.54 ; R53.1@701.57,10300 833.57,10432 1261.31,10432 R54.1@1388.58,10304.72 1480.86,10397 1692,10397 1784.28,10304.72 R55.1@2688.58,10304.72 2800.31,10193 3276.86,10193 R56.1@3388.58,10304.72 ; v1(3070,5137) 2968.74,5238.26 R107.2@2968.74,5298.54 ; v1(3594,2339) 3616,2361 v1(3835,2361) ; R108.2@3768.74,5298.54 3716.28,5351 3021.2,5351 R107.2@2968.74,5298.54
Net2514-_3: 2514-.3 R135.2 | length 18384.2
  Top Layer w25: 2514-.3@2700,16100 v1(2700,16508) ; v1(2927,1600.5) 2927,2014.49 R135.2@2927.93,2014.49
  Bottom Layer w25: v1(2700,16508) 4123,16508 4181,16450 4181.5,3384 4181.5,1682 4100,1600.5 v1(2927,1600.5)
Net2514-_4: 2514-.4 R136.2 | length 15846.6
  Top Layer w25: R136.2@2705.13,2131.02 2743.48,2131.02 2762,2112.5 v1(2762,1800)
  Bottom Layer w25: 2514-.4@2600,16100 4041,14659 4041,4542.5 4041.5,4542 4041.5,3480.14 4016,3454.64 4016,2981.48 3426.26,2391.74 3353.74,2391.74 v1(2762,1800)
Net2514-_5: 2514-.5 R137.2 | length 17099.3
  Top Layer w25: R137.2@2505.65,2131.02 2559.98,2131.02 2591,2100 v1(2591,1540)
  Bottom Layer w25: 2514-.5@2500,16100 2700,16300 2866,16300 4076,15090 4076,4577.5 4076.5,4577 4076.5,3445.14 4051,3419.64 4051,2872.32 3543.48,2364.8 3543.48,2295.19 3261.53,2013.24 3064.24,2013.24 v1(2591,1540)
Net2514-_6: 2514-.6 R138.2 | length 18582.5
  Top Layer w25: R138.2@2294.28,2142.15 2399,2142.15 v1(2406,1469)
  Bottom Layer w25: 2514-.6@2400,16100 2683,16383 4050,16383 4146,16287 4146,13362.47 4111,13327.47 4111.5,4612 4111.5,3410.14 4086,3384.64 4086,2755.23 3882.5,2551.73 3882.5,2326.32 3526.58,1970.4 3196.03,1970.4 2694.63,1469 v1(2406,1469)
Net2514-_7: 2514-.7 C5.1 | length 3021.4
  Top Layer w25: v1(3699,14701) 3699,14521 4172,14048 4172,13885 C5.1@4203,13885
  Bottom Layer w25: 2514-.7@2300,16100 v1(3699,14701)
Net2514-_8: 2514-.8 C9.1 | length 4557.9
  Top Layer w25: v1(2200,14726) 2514-.8@2200,16100 ; v1(3993,13436) 4168,13261 4168,12682.95 C9.1@4198.99,12682.95
  Bottom Layer w25: v1(2200,14726) 3490,13436 v1(3993,13436)
Net2514-_9: 2514-.9 C8.1 | length 5869.8
  Top Layer w25: 2514-.9@2100,16100 2100,16333 2150,16383 2983,16383 4308,15058 4308,12338.34 4234,12264.34 C8.1@4199.01,12264.34
Net2514-_10: 2514-.10 C7.1 | length 5530.8
  Top Layer w25: C7.1@536,12285 536,12576.5 439,12673.5 439,16150 492,16203 1897,16203 2514-.10@2000,16100
Net2514-_11: 2514-.11 C3.1 | length 4156.9
  Top Layer w25: C3.1@536,13485 548.5,13485 548.5,13732 474,13806.5 474,16100 535,16161 1837.5,16161 1861,16137.5 1861,16100 2514-.11@1900,16100
Net2514-_12: 2514-.12 C6.1 | length 4148.3
  Top Layer w25: C6.1@536,12685 536,12934 831,13229 831,13850 917,13936 1275,13936 1310,13971 1310,15610 2514-.12@1800,16100
Net2514-_13: 2514-.13 C4.1 | length 4042
  Top Layer w25: v1(3977,14343) 4273,14047 4273,13500 C4.1@4203,13485
  Bottom Layer w25: 2514-.13@1700,16100 2106,15694 2626,15694 v1(3977,14343)
Net2514-_14: 2514-.14 C2.1 | length 2695.3
  Top Layer w25: C2.1@544.27,13860 575,13860 575,15075 2514-.14@1600,16100
NetC2_2: C2.2 R1.2 R9.1 | length 771.4
  Top Layer w25: C2.2@678.27,13860 803.27,13985 R1.2@1036,13985 1171,13985 1236,14050 R9.1@1236,14185
NetC3_2: C3.2 R2.2 R10.1 | length 740.3
  Top Layer w25: C3.2@670,13485 738,13485 v1(780,13527) ; R2.2@1036,13468.46 1072,13468.46 ; v1(1072,13527) 1072,13468.46 ; R10.1@1236,13385 1236,13432.46 1200,13468.46 1072,13468.46
  Bottom Layer w25: v1(780,13527) v1(1072,13527)
NetC4_2: C4.2 R3.2 R11.1 | length 605.4
  Top Layer w25: R11.1@3518.73,13385 3619,13385 3635.54,13368.46 R3.2@3736,13368.46 3786.46,13368.46 3903,13485 C4.2@4069,13485
NetC5_2: C5.2 R4.2 R12.1 | length 753.3
  Top Layer w25: R12.1@3518.73,14203.88 3518.73,14082.8 3600,14001.54 R4.2@3736,14001.54 3903,14001.54 4019.54,13885 C5.2@4069,13885
NetC6_2: C6.2 R5.2 R13.1 | length 827.9
  Top Layer w25: C6.2@670,12685 R5.2@1036,12685 1171,12685 1236,12750 R13.1@1236,12985
NetC7_2: C7.2 R6.2 R14.1 | length 647.9
  Top Layer w25: C7.2@670,12285 R6.2@1036,12285 1150,12285 1227.44,12207.56 R14.1@1227.44,12149.22
NetC8_2: C8.2 R7.2 R15.1 | length 654.3
  Top Layer w25: R15.1@3518.73,12159.7 3518.73,12121.8 3528.04,12112.5 3577.04,12112.5 3733,12268.46 R7.2@3736,12268.46 3898,12268.46 3902.12,12264.34 C8.2@4065.01,12264.34
NetC9_2: C9.2 R8.2 R16.1 | length 753.4
  Top Layer w25: R16.1@3518.73,12967.84 3518.73,12882.8 3600,12801.54 R8.2@3736,12801.54 3982.46,12801.54 4034,12750 4034,12682.95 C9.2@4064.99,12682.95
NetC13_2: C13.2 R17.2 U1.3 | length 2466.5
  Top Layer w25: C13.2@1636,14001.54 1675,14001.54 1901.46,14228 2078,14228 2078,14342 1744.54,14342 1652.54,14250 ; R17.2@1652.54,14185 1652.54,14250 ; U1.3@2236,13885 2300,13885 2314.21,13899.21 2314.21,14343.79 2278.46,14379.54 1732.07,14379.54 1652.54,14300 1652.54,14250
NetC14_2: C14.2 R18.2 U1.5 | length 965.6
  Top Layer w25: R18.2@1694.27,13385 1694.27,13447 1636,13505.27 C14.2@1636,13568.46 1700,13568.46 1728,13596.46 1728,13713 1800,13785 U1.5@2236,13785
NetC15_2: C15.2 R19.2 U1.10 | length 936.7
  Top Layer w25: U1.10@2480,13785 2801,13785 v1(2832,13754) ; v1(3017.54,13568.46) 3094.46,13568.46 ; R19.2@3076.16,13385 3076.16,13550.16 3094.46,13568.46 ; C15.2@3136,13568.46 3094.46,13568.46
  Bottom Layer w25: v1(2832,13754) v1(3017.54,13568.46)
NetC16_2: C16.2 R20.2 U1.12 | length 1377.6
  Top Layer w25: U1.12@2480,13885 2803.18,13885 2879.5,13808.68 2879.5,13706.99 2879,13706.49 2879,13643 3000,13643 3056,13699 3056,13950 3091,13985 C16.2@3136,13985 3097.29,14023.71 R20.2@3097.29,14203.88
NetC17_2: C17.2 R21.2 U2.3 | length 2851.2
  Top Layer w25: C17.2@1636,12743.27 C17.2@1651,12743.27 ; R21.2@1694.27,12993.63 1694.27,13113.27 1750,13169 2050,13169 2078,13141 2078,12950 2001,12873 1759,12873 1651,12765 C17.2@1651,12743.27 ; U2.3@2056,11400 1985,11400 1935,11450 1935,12132 1744,12323 1744,12700 1700.73,12743.27 C17.2@1651,12743.27
NetC18_2: C18.2 R22.2 U2.5 | length 1303.6
  Top Layer w25: C18.2@1636,12323.64 1636,12270.18 1708.18,12198 R22.2@1708.18,12145.73 1708.18,11968.82 1825,11852 1825,11350 1875,11300 U2.5@2056,11300
NetC19_2: C19.2 R23.2 U2.10 | length 2267.7
  Top Layer w25: U2.10@2300,11300 2249,11300 2224,11275 2224,11182.01 2250,11156.01 2450,11156.01 2481,11187.01 2481,12156 2485,12160 R23.2@3076.16,12160 ; R23.2@3076.16,12159.7 R23.2@3076.16,12160 ; C19.2@3134.43,12351.56 3090.21,12351.56 3076.16,12337.5 R23.2@3076.16,12160
NetC20_2: C20.2 R24.2 U2.12 | length 2449.9
  Top Layer w25: v1(2222,11402) 2224,11400 U2.12@2300,11400 ; R24.2@3076.16,12967.84 3076.16,12844.84 C20.2@3136,12785 3121,12785 v1(3121,12727)
  Bottom Layer w25: v1(2222,11402) 2893,11402 3121,11630 v1(3121,12727)
NetC22_1: C22.1 R9.2 R17.1 | length 795.9
  Top Layer w25: R9.2@1352.54,14185 R17.1@1536,14185 1536,14150 1562,14124 1690.27,14124 1851.27,14285 C22.1@2036,14285
NetC22_2: C22.2 R29.2 R37.1 U1.1 | length 4299.3
  Top Layer w25: v1(431.5,12429.5) 431.5,11884.5 531,11785 R37.1@1133.31,11785 ; R29.2@2050.96,14001.54 2144,14001.54 ; v1(2073,14071) 2152.54,14150.54 ; C22.2@2152.54,14285 2152.54,14150.54 ; 2144,14001.54 2152.54,14001.54 2152.54,14150.54 ; 2144,14001.54 U1.1@2236,13985 2160.54,13985 2144,14001.54
  Bottom Layer w25: v1(431.5,12429.5) v1(2073,14071)
NetC23_1: C23.1 R25.1 R30.1 U1.6 | length 2255.7
  Top Layer w25: R25.1@1836,14001.54 1810,14001.54 1693,13884.54 1693,13643 1622,13643 1579,13600 1579,13508 1632,13455 1632,13350 1664,13318 1754,13318 1836,13400 R30.1@1836,13568.46 ; C23.1@2036,13385 2036,13500 1967.54,13568.46 R30.1@1836,13568.46 ; U1.6@2236,13735 1800,13735 1779,13714 1779,13589.46 1800,13568.46 R30.1@1836,13568.46
NetC23_2: C23.2 R30.2 R38.1 U1.7 | length 2657.2
  Top Layer w25: R38.1@1333.31,11785 1348,11785 1348,11948 v1(1445,12045) ; R30.2@1836,13685 2175,13685 ; v1(2140,13182) 2140,13254.46 2152.54,13267 C23.2@2152.54,13385 2152.54,13662.54 2175,13685 ; U1.7@2236,13685 2175,13685
  Bottom Layer w25: v1(1445,12045) 1445,12487 v1(2140,13182)
NetC24_1: C24.1 R11.2 R19.1 | length 939.4
  Top Layer w25: C24.1@2536,13385 2594,13327 3148,13327 3163,13342 3192.69,13342 R19.1@3192.69,13385 R11.2@3402.2,13385
NetC24_2: C24.2 R31.2 R39.1 U1.8 | length 2654.5
  Top Layer w25: R39.1@1533.31,11785 1572,11785 v1(1572,11832) ; v1(2344,12611) 2344,13034 2398,13088 2398,13230.54 2419.46,13252 C24.2@2419.46,13385 2419.46,13685 U1.8@2480,13685 2596.54,13568.46 R31.2@2736,13568.46
  Bottom Layer w25: v1(1572,11832) 1572,11839 v1(2344,12611)
NetC25_1: C25.1 R26.1 R32.1 U1.13 | length 1486.5
  Top Layer w25: U1.13@2480,13935 2901,13935 2936,13900 R32.1@2936,13868.46 ; C25.1@2552.54,14285 2764,14285 3021,14028 3021,13900 2989.46,13868.46 R32.1@2936,13868.46 ; R26.1@2936,13685 R32.1@2936,13868.46
NetC25_2: C25.2 R32.2 R40.1 U1.14 | length 3528.8
  Top Layer w25: R40.1@1731.37,11785 1731,11785 1731,11735 v1(1733.5,11732.5) ; C25.2@2436,14285 2436,14029 U1.14@2480,13985 v1(2815.58,13985) R32.2@2936,13985
  Bottom Layer w25: v1(1733.5,11732.5) 2784,12783 2784,13953.42 v1(2815.58,13985)
NetC26_1: C26.1 R13.2 R21.1 | length 773.3
  Top Layer w25: R13.2@1352.54,12985 1460,12985 1468.63,12993.63 R21.1@1577.73,12993.63 1638.36,12933 1888.38,12933 C26.1@2036,13080.62
NetC26_2: C26.2 R33.2 R41.1 U2.1 | length 2650.2
  Top Layer w25: U2.1@2056,11500 2108.5,11500 ; v1(2109,11615) 2109,11500 2108.5,11500 ; C26.2@2152.54,13080.62 2152.54,12844.84 R33.2@2050.96,12743.27 2089.73,12743.27 2142.52,12690.48 2142.52,12568.19 2100,12525.68 2100,11969.13 2108.5,11960.63 2108.5,11500 ; v1(2665,11615) 2665,11762.5 2687.5,11785 R41.1@2729.88,11785
  Bottom Layer w25: v1(2109,11615) v1(2665,11615)
NetC27_1: C27.1 R27.1 R34.1 U2.6 | length 2624.9
  Top Layer w25: R34.1@1836,12440.18 1779,12497.18 1779,12686.27 R27.1@1836,12743.27 1949.06,12743.27 2024,12668.33 2107.52,12668.33 2107.52,12585 2036,12513.48 C27.1@2036,12085 v1(2036,11644) ; v1(1921,11204) 1967,11250 U2.6@2056,11250
  Bottom Layer w25: v1(1921,11204) 1939.5,11185.5 1939.5,11137.5 1962.5,11114.5 2059.5,11114.5 2085,11140 2085,11555.3 2036,11604.3 v1(2036,11644)
NetC27_2: C27.2 R34.2 R42.1 U2.7 | length 3828.9
  Top Layer w25: R34.2@1836,12323.64 1875,12323.64 v1(1875,12371) ; v1(1987,11162) 1987,11187.49 2030.93,11195.46 U2.7@2037,11196.56 ; v1(2037,11162) U2.7@2037,11196.56 ; v1(2148,12009) 2152.54,12013.54 C27.2@2152.54,12085 ; R42.1@2932.51,11785 2940,11785 v1(2940,11727) ; U2.7@2037,11196.56 2037,11200 U2.7@2056,11200 U2.7@2037,11196.56
  Bottom Layer w25: v1(1875,12371) 1524,12020 1524,11675 1987,11212 v1(1987,11162) ; v1(2037,11162) 2037,11471.61 1988.5,11520.11 1988.5,11667.26 2048.24,11727 2430,11727 ; v1(2148,12009) 2430,11727 ; v1(2940,11727) 2430,11727
NetC28_1: C28.1 R15.2 R23.1 | length 1501.6
  Top Layer w25: C28.1@2541,12085 2541,12077 2706,11912 3050,11912 3076.15,11885.85 3076.15,11741 3175,11741 3192.69,11758.69 R23.1@3192.69,12159.7 R15.2@3402.2,12159.7